# EAGLE board Fall Sensor BRD (EAGLE 6.2)
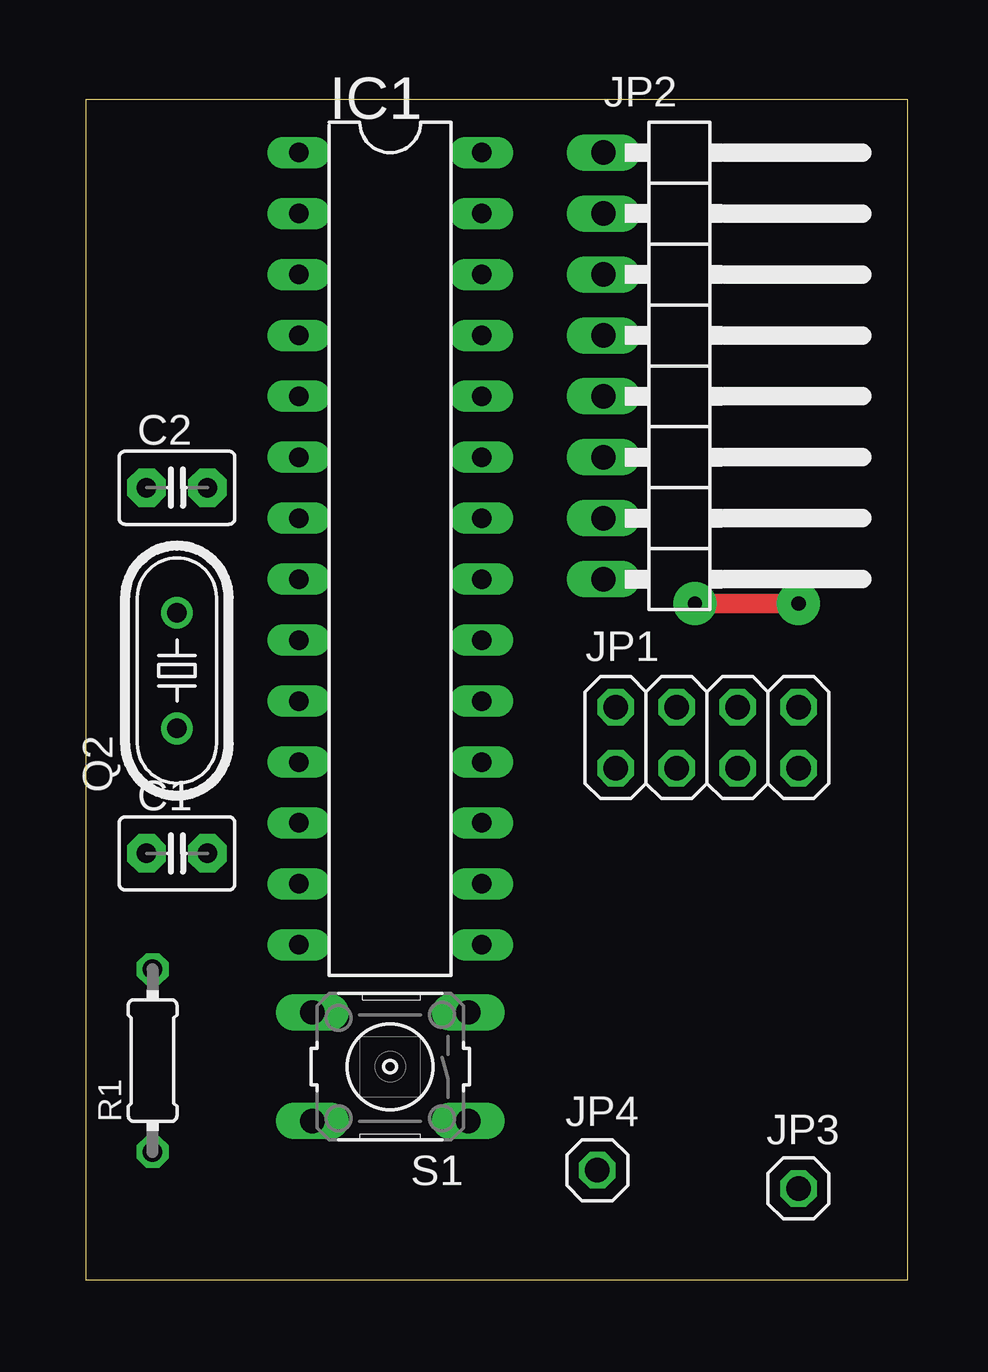
[diagram p0: board, top side]
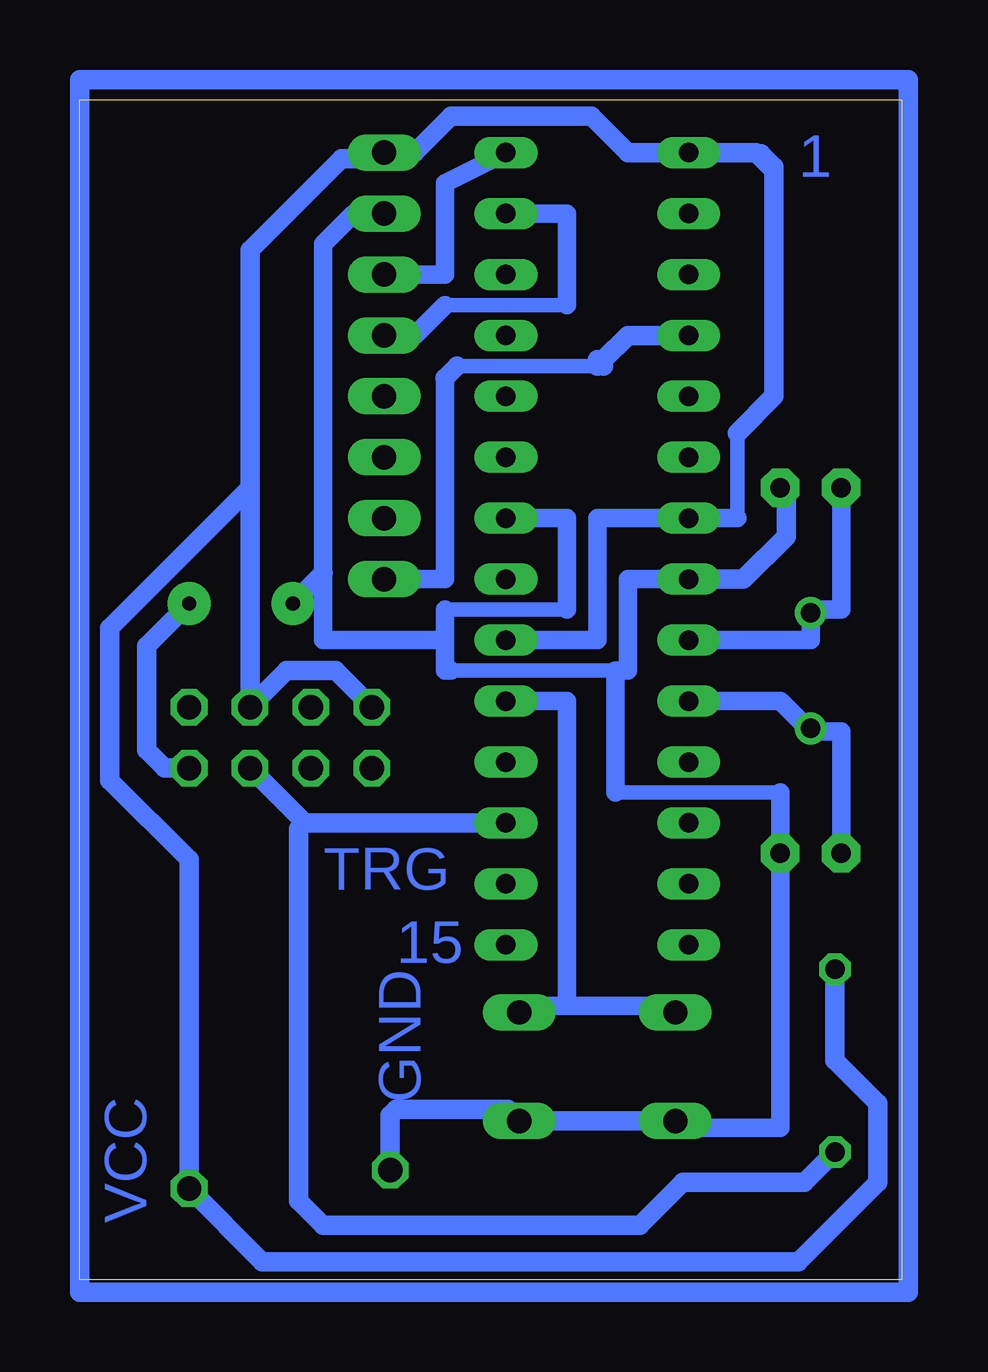
[diagram p1: board, bottom side, seen from below]

Size 34.27 x 49.2 mm. Coordinates in mm from the lower left corner, seen from the top.
Outline: 0,0 34.27,0 34.27,49.2 0,49.2 0,0
Copper layers (1*16): Top 0.035mm / dielectric 1.5mm / Bottom 0.035mm
Design rules: minimum track width 30mil, minimum drill 24mil, track to track 8mil, track to pad 8mil, pad to pad 8mil, via to via 8mil, smd to smd 8mil, copper to edge 40mil, drill to drill 8mil, minimum pad ring 10mil, minimum via ring 8mil, stop-mask expansion 4mil, vias tented up to drill 0mil, thermal gap 10mil

## Footprints (pad centres in the part's own frame; a part is rotated, then mirrored left to right if it is on the bottom)
C2.5-3 = drill 0.813 pad 1.6 octagon: 1 -1.27,0; 2 1.27,0
DIL28-3 = drill 0.813 long: 1 -16.51,-3.81; 2 -13.97,-3.81; 3 -11.43,-3.81; 4 -8.89,-3.81; 5 -6.35,-3.81; 6 -3.81,-3.81; 7 -1.27,-3.81; 8 1.27,-3.81; 9 3.81,-3.81; 10 6.35,-3.81; 11 8.89,-3.81; 12 11.43,-3.81; 13 13.97,-3.81; 14 16.51,-3.81; 15 16.51,3.81; 16 13.97,3.81; 17 11.43,3.81; 18 8.89,3.81; 19 6.35,3.81; 20 3.81,3.81; 21 1.27,3.81; 22 -1.27,3.81; 23 -3.81,3.81; 24 -6.35,3.81; 25 -8.89,3.81; 26 -11.43,3.81; 27 -13.97,3.81; 28 -16.51,3.81
2X04 = drill 1.016 octagon: 1 -3.81,-1.27; 2 -3.81,1.27; 3 -1.27,-1.27; 4 -1.27,1.27; 5 1.27,-1.27; 6 1.27,1.27; 7 3.81,-1.27; 8 3.81,1.27
1X08/90 = drill 1.016 long: 1 -8.89,-3.81; 2 -6.35,-3.81; 3 -3.81,-3.81; 4 -1.27,-3.81; 5 1.27,-3.81; 6 3.81,-3.81; 7 6.35,-3.81; 8 8.89,-3.81
1X01 = drill 1.016 octagon: 1 0,0
HC49/S = drill 0.813: 1 -2.413,0; 2 2.413,0
0204/7 = drill 0.813 octagon: 1 -3.81,0; 2 3.81,0
B3F-10XX = drill 1.016 long: 1 -3.251,2.261; 2 3.251,2.261; 3 -3.251,-2.261; 4 3.251,-2.261

## Placement (x,y rotation side)
C1  [C2.5-3]  3.81,17.78 0 top
C2  [C2.5-3]  3.81,33.02 0 top
IC1  ATMEGA328-20P  [DIL28-3]  12.7,30.48 270 top
JP1  [2X04]  25.91,22.61 0 top
JP2  [1X08/90]  25.4,38.1 270 top
JP3  [1X01]  29.72,3.81 0 top
JP4  [1X01]  21.34,4.57 0 top
Q2  [HC49/S]  3.81,25.4 90 top
R1  [0204/7]  2.79,9.14 90 top
S1  [B3F-10XX]  12.7,8.89 180 top

## Library data of the parts
C1 C2 = capacitor-wima
IC1 = atmega328
JP1-JP4 = pinhead
Q2 = crystal; OC_FARNELL: 1667008; OC_NEWARK: unknown
R1 = rcl
S1 = switch-omron; MPN: B3F-1000; OC_FARNELL: 176432; OC_NEWARK: 36M3542

## Nets
GND: C1.2 C2.2 IC1.8 IC1.22 JP1.7 JP2.2 JP4.1 S1.1 S1.2
INT: IC1.4 JP2.8
N$6: C2.1 IC1.9 Q2.2
N$7: C1.1 IC1.10 Q2.1
RXD: JP1.1
SCL: IC1.28 JP2.3
SDA: IC1.27 JP2.4
SW: IC1.19 S1.3 S1.4
TRG: IC1.17 JP1.5 R1.1
TXD: JP1.8
VCC: IC1.1 IC1.7 IC1.20 JP1.2 JP1.6 JP2.1 JP3.1 R1.2

## Tracks (layer width: path | path; a pad name or v marks a point on that pad's centre or on a via)
GND  (via drill 0.6, 0.6 pad 1.78)
  Top 0.813: v29.72,28.19 v25.4,28.19
  Bottom 0.61: 5.08,20.32 11.94,20.32 | 11.94,25.4 18.8,25.4 | 19.05,27.94 13.97,27.94
  Bottom 0.762: S1.2 8.89,6.35 5.08,6.35 C1.2 5.08,20.32 | IC1.22 13.97,31.75 13.97,27.94 | 19.05,26.67 19.05,25.4 18.8,25.4 | 19.05,26.67 19.05,27.94 | JP2.2 22.86,44.45 24.13,43.18 24.13,29.46 24.13,26.67 19.05,26.67 | IC1.8 11.43,29.21 11.43,25.4 11.94,25.4 11.94,20.32
  Bottom 0.813: S1.2 S1.1 16.43,7.11 21.08,7.11 21.34,6.86 JP4.1 | IC1.8 6.6,29.21 4.83,30.99 4.83,32.77 C2.2 | JP1.7 30.73,21.34 31.5,22.1 31.5,26.42 v29.72,28.19 | v25.4,28.19 24.13,29.46
INT
  Bottom 0.61: 12.7,38.1 18.54,38.1
  Bottom 0.762: 19.05,37.59 19.05,29.21 JP2.8
  Bottom 0.813: IC1.4 11.43,39.37 12.45,38.35 12.45,38.1 12.7,38.35 12.7,38.1 | 18.54,38.1 19.05,37.59
N$1
  Bottom 0.813: -0.25,50.04 34.29,50.04 34.29,-0.51 -0.25,-0.51 -0.25,49.78 -0.25,50.04
N$6
  Bottom 0.762: IC1.9 3.81,26.67 Q2.2 3.81,27.94 2.54,27.94 C2.1
N$7
  Bottom 0.762: 3.81,22.86 5.08,24.13 IC1.10 | C1.1 2.54,22.86 3.81,22.86 | 3.81,22.86 Q2.1
SCL
  Bottom 0.762: IC1.28 19.05,45.72 19.05,41.91 JP2.3
SDA
  Bottom 0.61: 13.97,40.64 19.05,40.64
  Bottom 0.762: IC1.27 13.97,44.45 13.97,40.64 | 19.05,40.64 20.32,39.37 JP2.4
SW
  Bottom 0.762: IC1.19 13.97,24.13 13.97,11.43 | 13.97,11.43 15.24,11.43 S1.3 | 13.97,11.43 10.16,11.43 S1.4
TRG
  Bottom 0.813: IC1.17 24.89,19.05 | 24.89,19.05 JP1.5 | R1.1 4.06,4.06 9.14,4.06 10.92,2.29 24.13,2.29 25.15,3.3 25.15,18.8 24.89,19.05
VCC
  Bottom 0.61: 6.86,35.31 6.86,31.75
  Bottom 0.762: IC1.20 12.7,26.67 12.7,31.75 IC1.7 6.86,31.75
  Bottom 0.813: 6.86,35.31 5.33,36.83 5.33,46.23 | 5.33,46.23 5.33,46.4 5.88,46.95 | 5.33,46.23 6.1,46.99 IC1.1 11.43,46.99 12.95,48.51 18.8,48.51 20.32,46.99 JP2.1 21.84,46.74 23.37,46.74 27.18,42.93 27.18,33.02 | JP1.2 22.1,24.13 22.35,24.13 23.62,25.4 25.65,25.4 JP1.6 27.18,33.02 | 27.18,33.02 33.02,27.18 33.02,20.83 29.72,17.53 JP3.1 26.67,0.76 4.32,0.76 1.02,4.06 1.02,7.37 2.79,9.14 R1.2

## Text on the board
Bottom: 1 | TRG | 15 | GND | VCC